# Altium PCB No_Inversor.PcbDoc
Units mm, origin at the board's own origin, x right, y up, seen from the top; angles counter-clockwise.
Board outline 31 x 33 mm, 2 copper layers (Top Layer, Bottom Layer); 8 components, 20 nets, 23 pads, 2 vias.
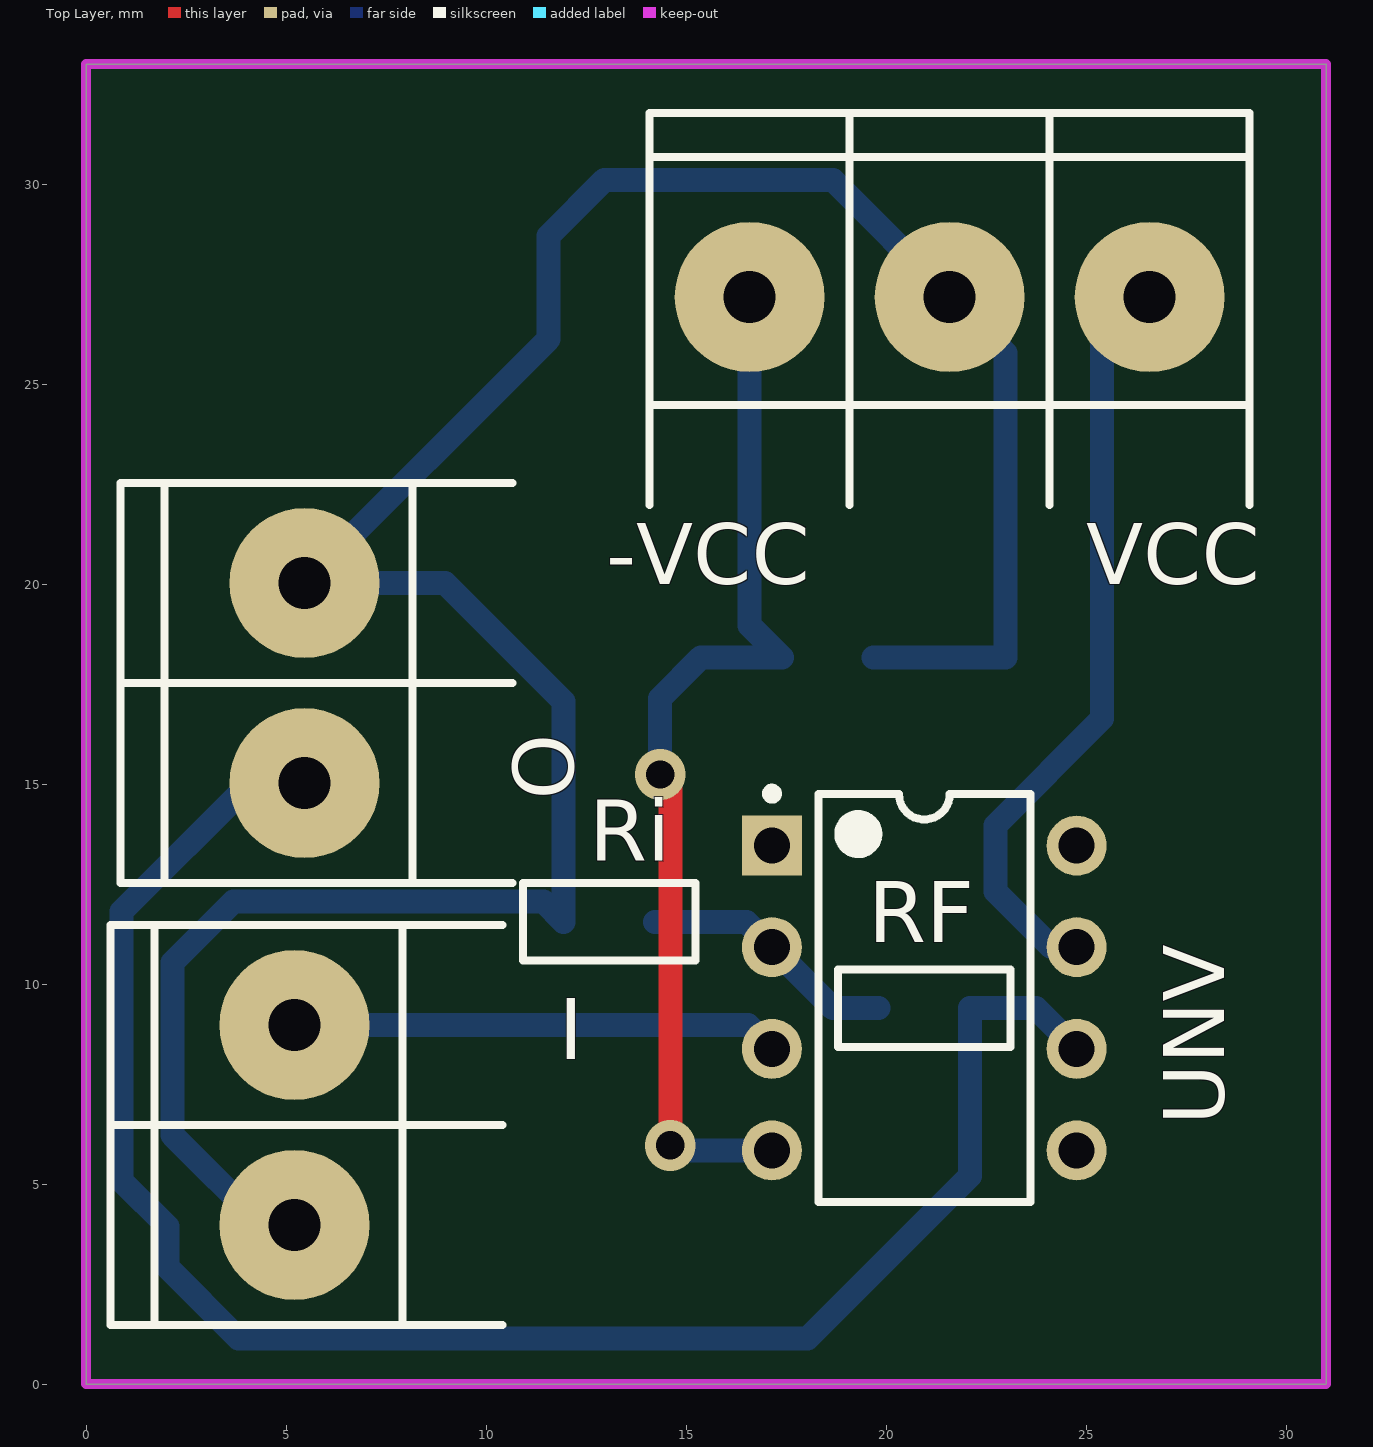
[diagram p0: Top Layer view]
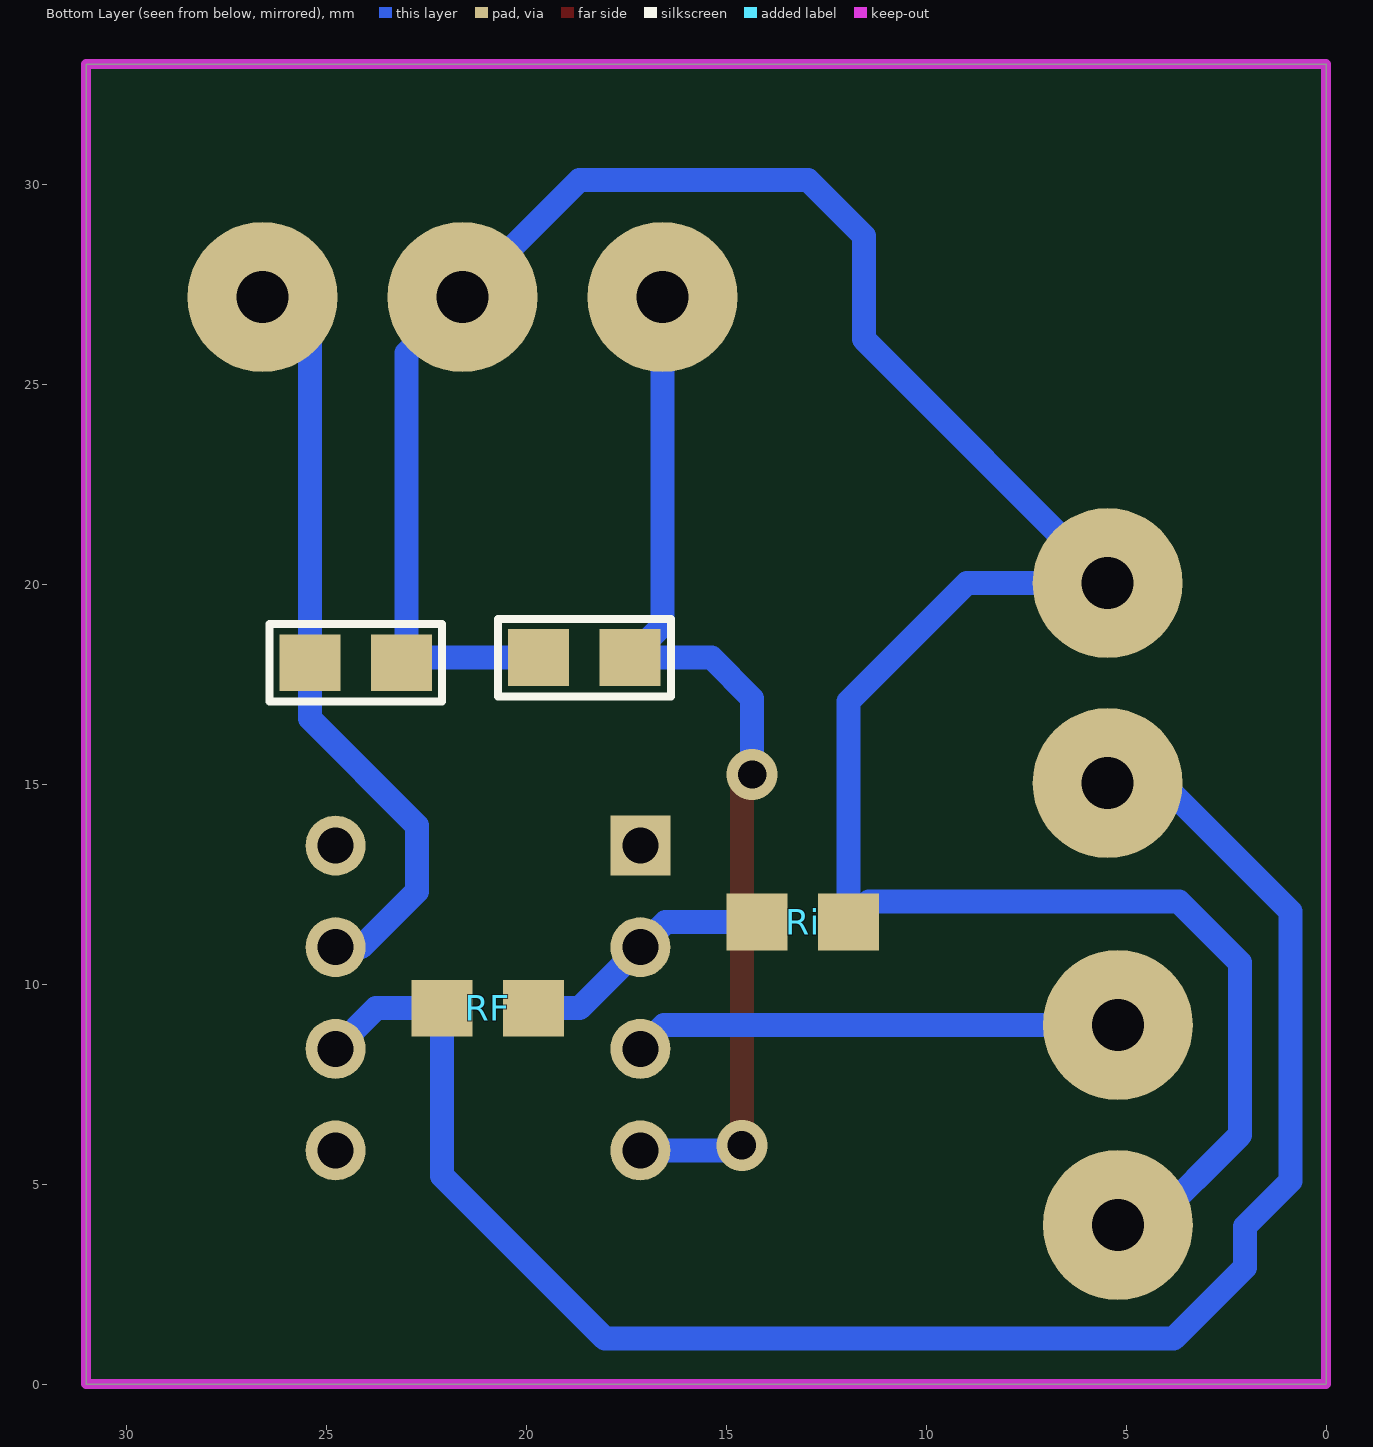
[diagram p1: Bottom Layer view, seen from below]
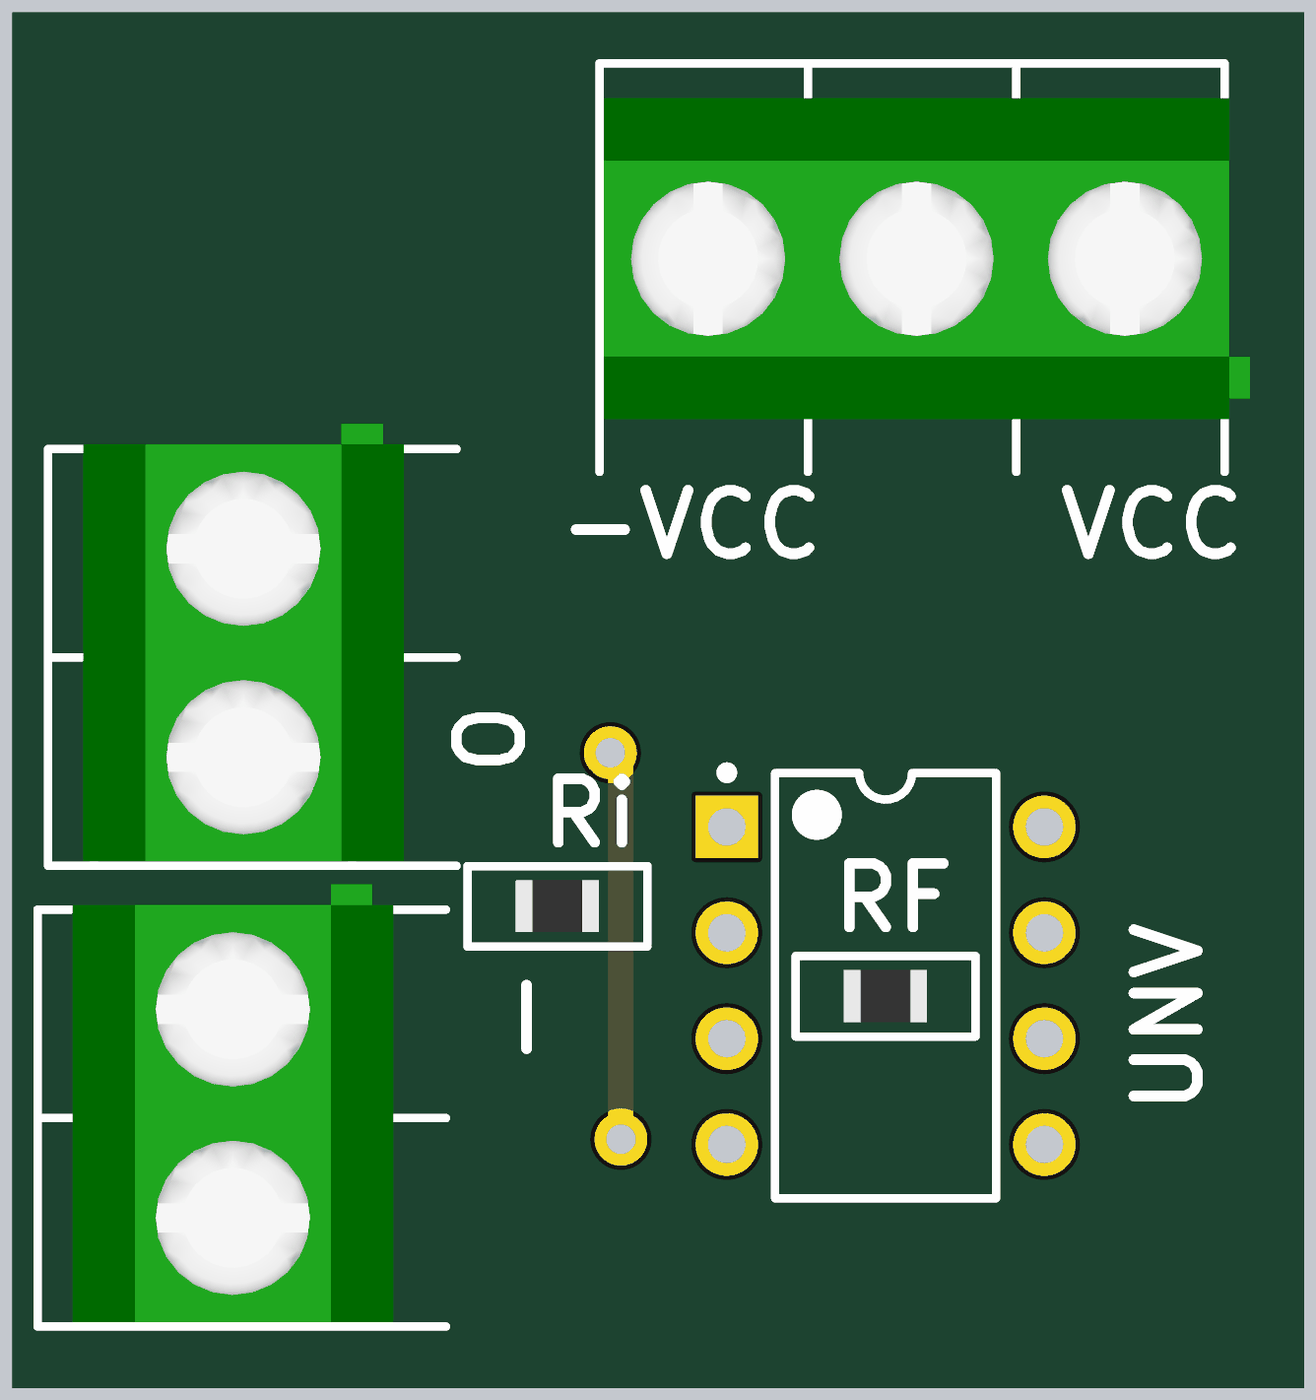
[diagram p2: 3D render of the assembled board from above, using the file's embedded part models]

## Layer stack, top to bottom
Top Solder: solder mask 0.0102, Solder Resist, Dk 3.5
Top Layer: signal copper 0.0356
Dielectric 1: dielectric 0.32, FR-4, Dk 4.8
Bottom Layer: signal copper 0.0356
Bottom Solder: solder mask 0.0102, Solder Resist, Dk 3.5

## Board outline
0,0 31,0 31,33 0,33

## Design rules (kind name [scope] priority, off if disabled: settings)
Clearance [All] p1: gap=0.254
PolygonConnect [All] p1: connectstyle=Relief reliefconductorwidth=0.254 reliefentries=4 polygonreliefangle="90 Angle" airgapwidth=0.254
RoutingVias [All] p1: holewidth=0.711 width=1.27 viastyle="Through Hole" minholewidth=0.711 minwidth=1.27 maxholewidth=0.711 maxwidth=1.27
SolderMaskExpansion [All] p1: expansion=0.102
Width [All] p1: maxlimit=0.6 minlimit=0.6 preferedwidth=0.6
30 further rules are at their usual default settings.

## Classes and differential pairs
component class No_Inversor: i o RF Ri UNV VCC ""

## Components (designator, comment, footprint, x,y, rotation, side; value= is the part's Value field where it differs from the comment)
C1NV "100n" 0805#1 24.257,18.034 r0 bottom
C2NV "100n" 0805#1 18.542,18.161 r180 bottom
I "BORNERA 2" BORNERA2 5.207,6.477 r0 top (schematic designator InNV)
O "BORNERA 2" BORNERA2 5.461,17.526 r0 top (schematic designator OutNV)
RF "10K" 0805#2 20.955,9.398 r0 top
Ri "10K" 0805#2 13.081,11.557 r0 top
UNV "TL081ACP" TI-P8 20.955,9.652 r0 top
VCC "BORNERA 3" BORNERA3 21.59,27.178 r270 top (schematic designator AlimentacionNV)

## Footprints (in the part's own frame and the unit in brackets; to place one, negate y for a bottom-side part, rotate by r counter-clockwise, add the part's x,y. Pads: shape width x height; smd on the part's side, far side on the other; paste and mask are expansions set on the pad)
0805#1 [mil] "Pasivo 0805"
  rect 60x56 smd: 1(-45,0) 2(45,0)
  silkscreen extent -85,-38 85,38, body extent -39,-25 39,25, height 15
0805#2 [mil] "Pasivo 0805"
  rect 60x56 smd far side: 1(-45,0) 2(45,0)
  silkscreen extent -85,-38 85,38, body extent -40,-24 39,25, height 15
BORNERA2 [mm] "Bornera con Tornillos 5mm separación"
  round 3.75 hole 1.3: 1(0,2.5) 2(0,-2.5)
  silkscreen extent -4.6,-5 5.2,5, body extent -3.76,-4.89 3.94,5.61, height 10
BORNERA3 [mm] "Bornera con Tornillos 5mm separación"
  round 3.75 hole 1.3: 1(0,5) 2(0,0) 3(0,-5)
  silkscreen extent -4.6,-7.5 5.2,7.5, body extent -3.76,-7.39 3.94,8.11, height 10.05
TI-P8 [mm] "DIP, 8-Leads, Body 9.59x6.35mm, Pitch 2.54mm"
  rect 1.5x1.5 hole 0.9: 1(-3.81,3.81)
  round 1.5 hole 0.9: 2(-3.81,1.27) 3(-3.81,-1.27) 4(-3.81,-3.81) 5(3.81,-3.81) 6(3.81,-1.27) 7(3.81,1.27) 8(3.81,3.81)
  silkscreen extent -3.93,-5.1 2.65,5.23, body extent -3.95,-5.07 3.95,5.07, height 5.08

## Part data
C1NV C2NV: library part CAP
RF Ri: library part RES
UNV: "JFET-Input Operational Amplifier, 7 to 36 V, 0 to 70 degC, 8-pin DIP (P8), Pb-Free (RoHS)"

## Via types
v1: diameter 1.27, hole 0.711, Top Layer to Bottom Layer, 2 vias

## Nets (pads, with @x,y where several pads share a name; then routed paths per layer and width w, separated by ;. In a path a pad name is that pad's centre, name@x,y a point inside that pad or via, vN(x,y) a via of type N, cw(c..) or ccw(c..) an arc to the next point about the centre after c; other vN are vias at no path point)
-VCC: C2NV.2 UNV.4 VCC.3 | length 26.3
  Top Layer w0.6: v1(14.605,5.969) v1@14.605,15.24
  Bottom Layer w0.6: v1(14.351,15.24) 14.351,17.145 15.367,18.161 C2NV.2 16.59,18.97 VCC.3 ; v1@14.859,5.842 UNV.4
GND: C1NV.1 C2NV.1 I.2 O.1 Ri.1 VCC.2 | length 68
  Bottom Layer w0.6: I.2 4.405,3.977 2.159,6.223 2.159,10.541 3.683,12.065 11.43,12.065 Ri.1 11.938,17.062 8.974,20.026 O.1 11.557,26.122 11.557,28.702 12.954,30.099 18.669,30.099 VCC.2 22.987,25.781 22.987,18.161 C2NV.1
NetC1_p_1: 
NetC1_p_2: 
NetC1_s1_2: 
NetC2_s1_2: 
NetC3_p_1: 
NetC3_s1_2: 
NetInNV_1: I.1 UNV.3 | length 12.2
  Bottom Layer w0.6: I.1 16.55,8.977 UNV.3
NetOut_1: 
NetOutNV_2: O.2 RF.2 UNV.6 | length 45
  Bottom Layer w0.6: O.2 4.104,15.026 0.889,11.811 0.889,5.08 2.032,3.937 2.032,2.921 3.81,1.143 18.034,1.143 22.098,5.207 RF.2 23.749,9.398 UNV.6
NetR1_p_2: 
NetR1_s1_2: 
NetR2_s1_2: 
NetR3_s1_2: 
NetR4_s1_2: 
NetR5_s1_2: 
NetR6_s1_2: 
NetRF_1: RF.1 Ri.2 UNV.2 | length 6.5
  Bottom Layer w0.6: Ri.2 16.51,11.557 UNV.2 18.669,9.398 RF.1
VCC: C1NV.2 UNV.7 VCC.1 | length 19.1
  Bottom Layer w0.6: UNV.7 24.13,10.922 22.733,12.319 22.733,13.97 25.4,16.637 C1NV.2 25.4,25.988 VCC.1
pads on no net: UNV.1 UNV.5 UNV.8

## Keep-outs
Keep-Out Layer:
  the board outline again, w0.254

## Silkscreen, mask and mechanical layers (free items; w line width, h text height)
Top Overlay:
  text "-VCC" at 13,20 h1.52